# Allegro board electrode 30x40.brd
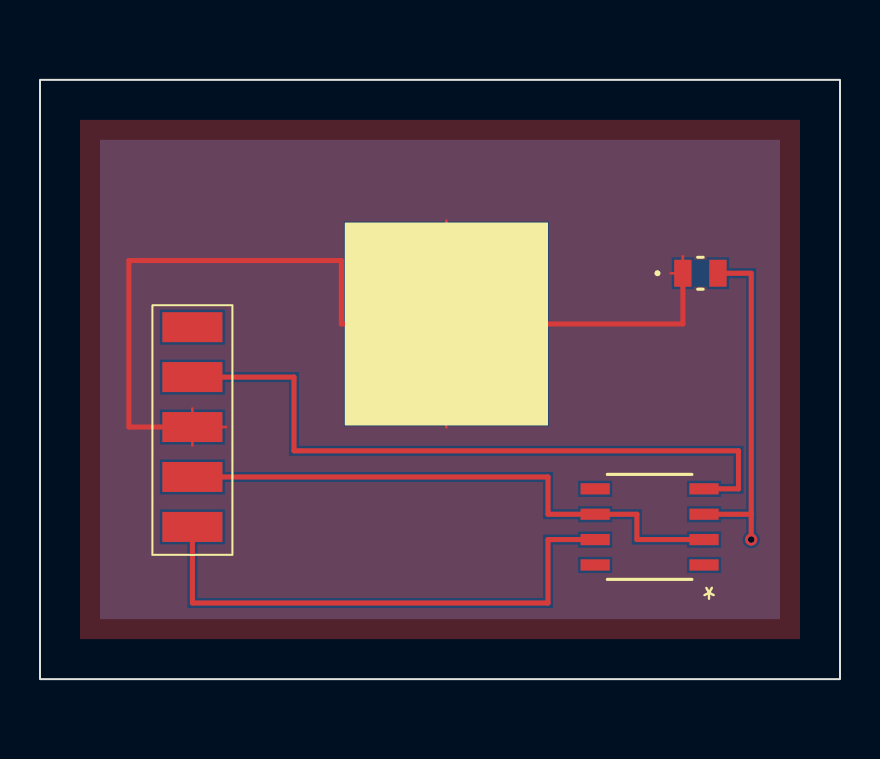
[diagram p0: board, top side]
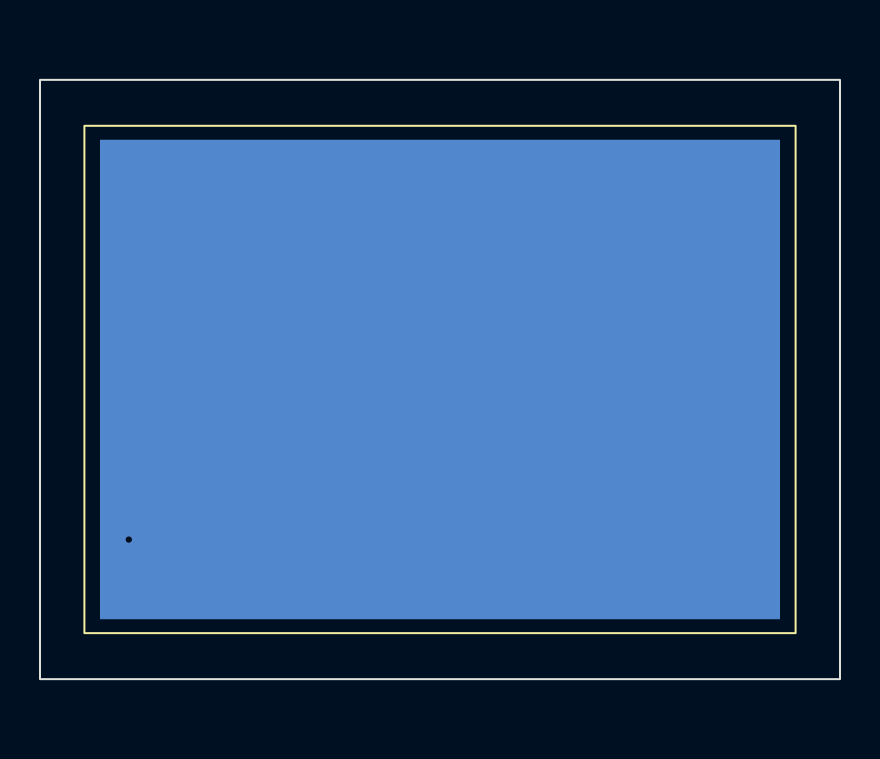
[diagram p1: board, bottom side, seen from below]

Outline 40 x 30 mm; copper layers: TOP, BOTTOM. Coordinates in mm from the lower left corner of the outline.
Outline path: rectangle 0,0 40,30

## Placement (name value [footprint] x y rotation side)
R1  1k  [0805]  33.02 20.32 0 top
TP1  T POINT R  [TP_PAD24X24]  20 15 180 bottom
U2  5 pad  [PAD_30X15]  7.62 7.62 180 top
U3  OPA124  [D8]  30.48 7.62 180 top
U4  sup_pad  [SUP10X10]  15.24 12.7 0 top

## Library data of the parts
R1 = R
TP1 = T POINT R
U2 = 5 pad
U3 = OPA124
U4 = sup_pad

## Footprints (pads in the part's own frame, mm; a bottom-side part is the same pattern mirrored in y, then rotated)
0805
  rect 0.864x1.346 smd: 1(-0.876,0) 2(0.876,0)
D8
  rect 1.455x0.558 smd: 1(-2.721,1.905) 2(-2.721,0.635) 3(-2.721,-0.635) 4(-2.721,-1.905) 5(2.721,-1.905) 6(2.721,-0.635) 7(2.721,0.635) 8(2.721,1.905)
PAD_30X15
  rect 3x1.5 smd: 1(0,0) 2(0,-2.5) 3(0,-5) 4(0,-7.5) 5(0,-10)
SUP10X10
  rect 10x10 smd: 1(5.08,5.08)
TP_PAD24X24
  rect 34x24 smd: 1(0,0)

## Nets
VCC: U2.1 U3.7(V+)
VEE: U2.4 U3.4(V-)
0: R1.1 U2.3 U4.1(GND)
N00091: R1.2 TP1.1(TP) U3.3(+IN)
N00095: U2.2 U3.2(-IN) U3.6(OUT)

Pads without a net: U2 5; U3 1 5 8

## Via types
v1: diameter 0.61, hole 0.33, TOP to BOTTOM, 1 via

## Routing (per net, layer and track width the routed paths; a pad name or vN(x,y) marks a point on that pad's centre or on a via; arc(x,y) is an arc through that point)
VCC: length 27.1
  TOP w0.25: U2.1 7.62,3.81 25.4,3.81 25.4,6.99 U3.7
VEE: length 34.6
  TOP w0.25: U2.4 12.7,15.12 12.7,11.43 34.92,11.43 34.92,9.53 U3.4
0: length 60.3
  TOP w0.127: U2.3 7.62,13.55 ; U2.3 9.3,12.62 ; U2.3 7.62,11.69 ; 32.14,21.17 R1.1 31.53,20.32 ; 20.32,12.6 U4.1 20.32,22.96
  TOP w0.25: R1.1 32.14,17.78 U4.1 15.07,17.78 15.07,20.95 4.45,20.95 4.45,12.62 U2.3
N00091: length 17.4
  TOP w0.25: R1.2 35.56,20.32 35.56,8.26 ; U3.3 35.56,8.26 ; 35.56,8.26 v1(35.56,6.99)
N00095: length 28.7
  TOP w0.25: U2.2 25.4,10.12 25.4,8.26 U3.6 29.84,8.26 29.84,6.99 U3.2

## Copper pours and planes (outline as drawn; the poured copper is in the pictures)
0 on TOP: 2,2 2,28 38,28 38,2
